# EAGLE board incubatorShieldSMD (EAGLE 8.5.1)
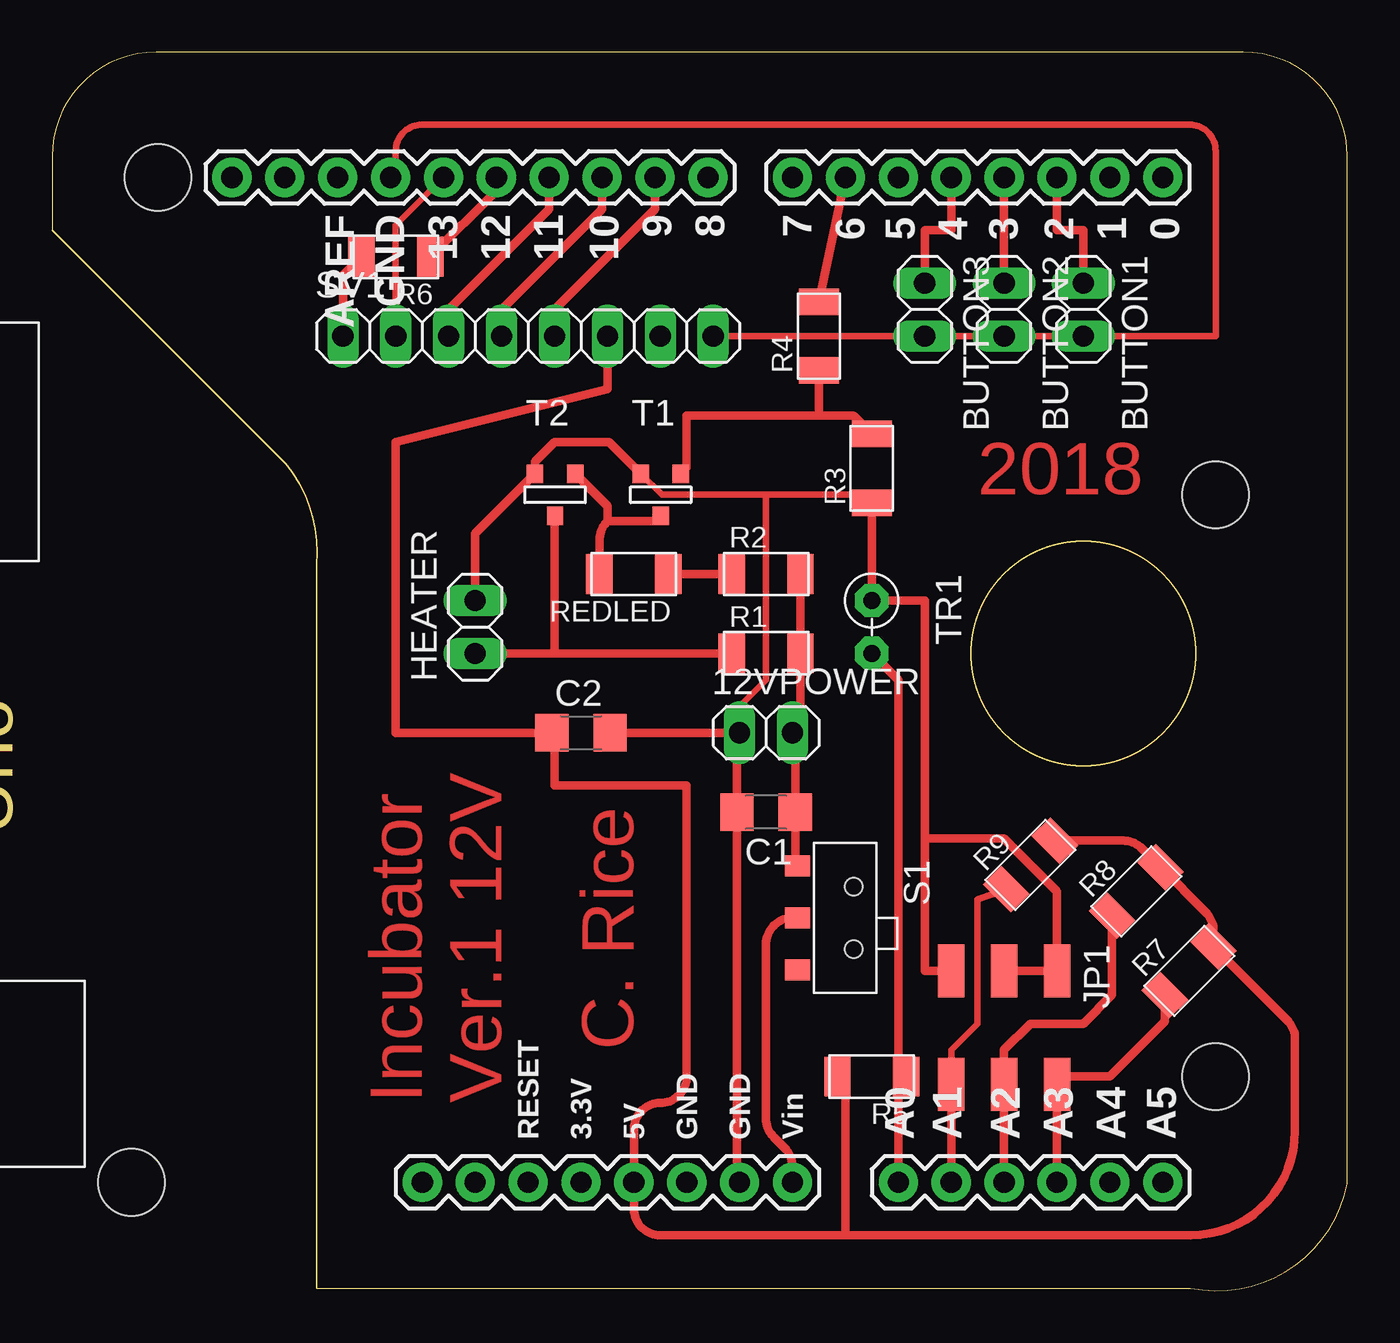
[diagram p0: board, top side]

Size 62.21 x 59.49 mm. Coordinates in mm from the lower left corner, seen from the top.
Outline: 12.7,0.13 54.67,0.13 arc90 62.21,5.13 62.21,54.49 arc90 57.21,59.49 5,59.49 arc90 0,54.49 0,50.93 11.24,39.69 arc-45 12.7,34.89 12.7,0.13
Outline: circle at 49.53,30.61 radius 5.39
Copper layers (1*16): Top 0.035mm / dielectric 1.5mm / Bottom 0.035mm
Design rules "default *": minimum track width 6mil, minimum drill 0.35mm, track to track 16mil, track to pad 16mil, pad to pad 16mil, via to via 16mil, smd to smd 16mil, copper to edge 40mil, drill to drill 6mil, minimum pad ring 10mil, minimum via ring 8mil, stop-mask expansion 4mil, vias tented up to drill 0mil, thermal gap 10mil

## Footprints (pad centres in the part's own frame; a part is rotated, then mirrored left to right if it is on the bottom)
1X02 = drill 1.016 long: 1 -1.27,0; 2 1.27,0
C1206 = smd 1.6 x 1.8: 1 -1.4,0; 2 1.4,0
2X03SMD = smd 2.54 x 1.27: 1 -2.54,2.54; 2 2.92,2.54; 3 -2.54,0; 4 2.92,0; 5 -2.54,-2.54; 6 2.92,-2.54
R1206FAB = smd 1.27 x 1.905: 1 -1.651,0; 2 1.651,0
LED1206FAB = smd 1.27 x 1.905: 1 -1.651,0; 2 1.651,0
AYZ0102AGRLC = smd 1 x 1.2: 1 2.5,-2.3; 2 0,-2.3; 3 -2.5,-2.3 | hole 0.85: -1.5,0.4; 1.5,0.4
1X08 = drill 1.016 long: 1 -8.89,0; 2 -6.35,0; 3 -3.81,0; 4 -1.27,0; 5 1.27,0; 6 3.81,0; 7 6.35,0; 8 8.89,0
SOT-23 = smd 0.787 x 0.889: 1 0.025,-1.016; 2 -0.94,1.016; 3 0.991,1.016
RS-2,5 = drill 0.813 pad 1.6 octagon: 1 -1.27,0; 2 1.27,0
ARDUINO_UNO_UNBOUND = drill 1.016 pad 1.88: 0 63.5,50.8; 1 60.96,50.8; 2 58.42,50.8; 3 55.88,50.8; 3.3V 35.56,2.54; 4 53.34,50.8; 5 50.8,50.8; 5V 38.1,2.54; 6 48.26,50.8; 7 45.72,50.8; 8 41.656,50.8; 9 39.116,50.8; 10 36.576,50.8; 11 34.036,50.8; 12 31.496,50.8; 13 28.956,50.8; A0 50.8,2.54; A1 53.34,2.54; A2 55.88,2.54; A3 58.42,2.54; A4 60.96,2.54; A5 63.5,2.54; AREF 23.876,50.8; GND 26.416,50.8; GND. 43.18,2.54; GND.. 40.64,2.54; I/OREF 30.48,2.54; N/C 27.94,2.54; RESET 33.02,2.54; SCL 18.796,50.8; SDA 21.336,50.8; VIN 45.72,2.54 | hole 3.2: 66.04,7.62; 66.04,35.56; 15.24,50.8; 13.97,2.54

## Placement (x,y rotation side)
12VPOWER  [1X02]  34.29,26.8 0 top
BUTTON1  [1X02]  49.53,47.12 270 top
BUTTON2  [1X02]  45.72,47.12 270 top
BUTTON3  [1X02]  41.91,47.12 270 top
C1  CAP-US1206  [C1206]  34.29,22.99 180 top
C2  CAP-US1206  [C1206]  25.4,26.8 0 top
HEATER  [1X02]  20.32,31.88 90 top
JP1  [2X03SMD]  45.72,12.83 270 top
R1  10k  [R1206FAB]  34.29,30.61 0 top
R2  4.7k  [R1206FAB]  34.29,34.42 0 top
R3  10k  [R1206FAB]  39.37,39.5 90 top
R4  1k  [R1206FAB]  36.83,45.85 90 top
R5  4.7k  [R1206FAB]  39.37,10.29 180 top
R6  0  [R1206FAB]  16.51,49.66 180 top
R7  4.7k  [R1206FAB]  54.61,15.37 45 top
R8  4.7k  [R1206FAB]  52.07,19.18 45 top
R9  4.7k  [R1206FAB]  46.99,20.45 45 top
REDLED  LEDFAB1206  [LED1206FAB]  27.94,34.42 180 top
S1  SLIDE-SWITCH  [AYZ0102AGRLC]  38.1,17.91 270 top
SV1  [1X08]  22.86,45.85 0 top
T1  [SOT-23]  29.21,38.23 0 top
T2  [SOT-23]  24.13,38.23 0 top
TR1  [RS-2,5]  39.37,31.88 270 top
U$2  ARDUINO_UNO_UNBOUND  [ARDUINO_UNO_UNBOUND]  -10.16,2.67 0 top

## Library data of the parts
12VPOWER BUTTON1-BUTTON3 HEATER SV1 = pinhead
C1 C2 JP1 R1-R9 REDLED S1 T1 T2 = fab
TR1 = discrete
U$2 = Arduino

## Nets
3.3VOUT: SV1.7
+5V: C2.1 R5.2 R7.2 R8.2 R9.2 SV1.6 U$2.5V
+12V: 12VPOWER.2 C1.1 R1.2 R2.2 S1.3
B1: BUTTON1.1 U$2.2
B2: BUTTON2.1 U$2.3
B3: BUTTON3.1 U$2.4
CLK: SV1.4 U$2.10
CS: R6.1 U$2.12
D/C: SV1.3 U$2.11
DATA: SV1.5 U$2.9
GND: BUTTON1.2 BUTTON2.2 BUTTON3.2 SV1.8 U$2.GND
GNDA: 12VPOWER.1 C1.2 C2.2 HEATER.2 JP1.1 JP1.3 JP1.5 R3.1 T1.2 T2.2 TR1.1 U$2.GND.
HEAT1: R4.2 U$2.6
HEATER_LOGIC: HEATER.1 R1.1 T2.1
N$1: REDLED.2 T1.1 T2.3
N$2: R6.2 SV1.1
N$3: R3.2 R4.1 T1.3
N$4: R2.1 REDLED.1
N$5: S1.2 U$2.VIN
N$9: U$2.8
PTEMP1: JP1.6 R9.1 U$2.A1
PTEMP2: JP1.4 R8.1 U$2.A2
PTEMP3: JP1.2 R7.1 U$2.A3
RST: SV1.2 U$2.13
TEMP1: R5.1 TR1.2 U$2.A0

## Tracks (layer width: path | path; a pad name or v marks a point on that pad's centre or on a via)
+5V
  Top 0.406: R5.2 38.1,10.29 38.1,2.67 | 38.1,2.67 29.21,2.67 arc-90 27.94,3.94 U$2.5V 27.94,7.75 arc-90 29.21,9.02 arc90 30.48,10.29 30.48,24.26 24.13,24.26 24.13,26.67 C2.1 | SV1.6 26.67,43.31 16.51,40.77 16.51,26.8 C2.1 | C2.1 24.13,26.8 | 38.1,2.67 54.69,2.67 arc90 59.69,7.67 59.69,12.1 arc45 59.32,12.99 R7.2 55.78,17.28 arc45 55.4,18.18 R8.2 52.34,21.24 arc45 51.44,21.61 R9.2
+12V
  Top 0.406: R2.2 R1.2 35.94,27.72 arc-45 12VPOWER.2 arc-45 35.69,26.48 C1.1 35.69,20.52 S1.3
B1
  Top 0.406: BUTTON1.1 49.53,50.93 48.26,50.93 U$2.2
B2
  Top 0.406: BUTTON2.1 U$2.3
B3
  Top 0.406: BUTTON3.1 41.91,50.93 43.18,50.93 U$2.4
CLK
  Top 0.406: SV1.4 21.59,47.12 26.42,51.94 U$2.10
CS
  Top 0.406: R6.1 21.34,52.83 U$2.12
D/C
  Top 0.406: SV1.3 19.05,47.12 23.88,51.94 U$2.11
DATA
  Top 0.406: SV1.5 24.13,47.12 28.96,51.94 U$2.9
GND
  Top 0.305: U$2.GND 16.51,53.72 16.51,54.74 arc-90 17.78,56.01 54.61,56.01 arc-90 55.88,54.74 55.88,45.85 BUTTON1.2 BUTTON2.2 BUTTON3.2 SV1.8
GNDA
  Top 0.305: T1.2 29.29,38.23 34.29,38.23 | 34.29,38.23 39.37,38.23 R3.1 | 12VPOWER.1 33.02,28.07 34.29,29.34 34.29,38.23
  Top 0.406: HEATER.2 20.32,36.37 T2.2 23.19,39.83 24.13,40.77 26.75,40.77 T1.2 | U$2.GND. arc-45 32.89,5.52 C1.2 32.89,26.48 arc-45 12VPOWER.1 C2.2 | R3.1 TR1.1 41.91,33.15 41.91,21.72 | 41.91,21.72 41.91,15.37 JP1.5 | JP1.3 JP1.1 48.26,19.18 45.72,21.72 41.91,21.72
HEAT1
  Top 0.406: U$2.6 R4.2
HEATER_LOGIC
  Top 0.406: HEATER.1 24.13,30.61 | 24.13,30.61 24.13,37.19 T2.1 | 24.13,30.61 R1.1
N$1
  Top 0.406: T1.1 28.98,36.96 26.67,36.96 | 26.67,36.96 26.67,37.69 T2.3 | REDLED.2 26.29,36.04 arc-45 26.67,36.96
N$2
  Top 0.406: R6.2 13.97,48.77 SV1.1
N$3
  Top 0.406: T1.3 30.48,39.52 30.48,42.04 36.83,42.04 | 36.83,42.04 38.48,42.04 R3.2 | R4.1 36.83,42.04
N$4
  Top 0.406: R2.1 REDLED.1
N$5
  Top 0.406: S1.2 35.56,17.91 arc90 34.29,16.64 34.29,8.27 arc45 34.66,7.37 35.19,6.85 arc-45 35.56,5.95 U$2.VIN
PTEMP1
  Top 0.254: JP1.6 43.18,10.29
  Top 0.305: R9.1 44.45,18.8 44.45,12.83 43.18,11.56 JP1.6
  Top 0.406: JP1.6 U$2.A1
PTEMP2
  Top 0.406: U$2.A2 JP1.4 45.72,11.56 46.99,12.83 49.53,12.83 50.9,14.2 R8.1
PTEMP3
  Top 0.406: U$2.A3 JP1.2 48.64,10.29 50.8,10.29 53.44,12.93 R7.1
RST
  Top 0.305: U$2.13 16.51,51.18 SV1.2
TEMP1
  Top 0.406: 40.26,5.59 U$2.A0 40.64,9.91 R5.1 40.64,10.29 40.64,29.34 TR1.2

## Text on the board
Top: 2018 | C. Rice | Incubator / Ver.1 12V